# Allegro board wilkinson.brd
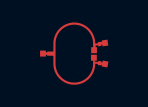
[diagram p0: board, top side]
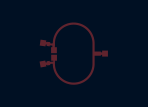
[diagram p1: board, bottom side, seen from below]

No outline. copper layers: TOP, BOTTOM. Coordinates in mm from the lowest, leftmost part position.

## Design rules (mm)
constraint set DEFAULT: min track width 0.127

## Placement (name value [footprint] x y rotation side)
U1  wilkinson  [WIL_SYM]  0 0 0 top

## Library data of the parts
U1 = wilkinson

## Footprints (pads in the part's own frame, mm; a bottom-side part is the same pattern mirrored in y, then rotated)
WIL_SYM
  rect 0.29x0.3 smd: 1(-0.575,0.002) 4(1.981,0.171) 5(1.975,-0.207)
  rect 0.29x0.3 smd rot 7.9: 2(2.528,0.531)
  rect 0.29x0.3 smd rot 169.6: 3(2.531,-0.519)

## Nets
INPUT: U1.1 U1.2 U1.3 U1.4 U1.5(R_2)

## Routing (per net, layer and track width the routed paths; a pad name or vN(x,y) marks a point on that pad's centre or on a via; arc(x,y) is an arc through that point)
INPUT: length 1.4
  TOP w0.08: U1.5 1.98,-0.41
  TOP w0.127: 2,0.47 2,0.19 U1.4 ; 2.3,-0.5 2.51,-0.5 U1.3 ; 2.26,0.51 2.51,0.51 U1.2 ; -0.2,0 U1.1

## Copper pours and planes (outline as drawn; the poured copper is in the pictures)
INPUT on TOP (solid shape): 1.07,1.55 1.13,1.55 1.18,1.54 1.23,1.53 1.29,1.51 1.34,1.5 1.39,1.48 1.44,1.46 1.48,1.43 1.53,1.41 1.58,1.38 1.62,1.35 1.66,1.31 1.7,1.28 1.74,1.24 1.78,1.2 1.81,1.16 1.85,1.12 1.88,1.07 1.9,1.02 1.93,0.98 1.95,0.93 1.97,0.88 1.99,0.83 2.01,0.78 2.02,0.72 2.03,0.67 2.03,0.62 2.04,0.56 2.04,0.51 2.11,0.51 2.17,0.52 2.16,0.57 2.32,0.59 2.35,0.39 2.2,0.36 2.19,0.41 2.04,0.4 1.93,0.4 1.93,0.51 1.93,0.56 1.93,0.6 1.92,0.65 1.9,0.75 1.89,0.79 1.87,0.84 1.85,0.88 1.83,0.93 1.81,0.97 1.78,1.01 1.76,1.05 1.73,1.09 1.7,1.13 1.67,1.16 1.63,1.2 1.59,1.23 1.56,1.26 1.52,1.29 1.48,1.31 1.43,1.34 1.39,1.36 1.35,1.38 1.3,1.39 1.26,1.41 1.21,1.42 1.16,1.43 1.11,1.44 1.07,1.44 1.02,1.45 0.97,1.45 0.92,1.44 0.87,1.44 0.82,1.43 0.78,1.42 0.73,1.41 0.68,1.39 0.64,1.38 0.59,1.36 0.55,1.34 0.51,1.31 0.47,1.29 0.43,1.26 0.39,1.23 0.36,1.2 0.32,1.16 0.29,1.13 0.26,1.09 0.23,1.05 0.2,1.01 0.18,0.97 0.15,0.93 0.13,0.88 0.11,0.84 0.1,0.79 0.09,0.75 0.07,0.7 0.07,0.65 0.06,0.6 0.06,0.56 0.05,0.51 0.05,-0.51 0.06,-0.56 0.06,-0.6 0.07,-0.65 0.07,-0.7 0.09,-0.75 0.1,-0.79 0.11,-0.84 0.13,-0.88 0.15,-0.93 0.18,-0.97 0.2,-1.01 0.23,-1.05 0.26,-1.09 0.29,-1.13 0.32,-1.16 0.36,-1.2 0.39,-1.23 0.43,-1.26 0.47,-1.29 0.51,-1.31 0.55,-1.34 0.59,-1.36 0.64,-1.38 0.68,-1.39 0.73,-1.41 0.78,-1.42 0.82,-1.43 0.87,-1.44 0.92,-1.44 0.97,-1.45 1.02,-1.45 1.07,-1.44 1.11,-1.44 1.16,-1.43 1.21,-1.42 1.26,-1.41 1.3,-1.39 1.35,-1.38 1.39,-1.36 1.43,-1.34 1.48,-1.31 1.52,-1.29 1.56,-1.26 1.59,-1.23 1.63,-1.2 1.67,-1.16 1.7,-1.13 1.73,-1.09 1.76,-1.05 1.78,-1.01 1.81,-0.97 1.83,-0.93 1.85,-0.88 1.87,-0.84 1.89,-0.79 1.9,-0.75 1.92,-0.65 1.93,-0.6 1.93,-0.56 1.93,-0.51 1.93,-0.4 2.04,-0.4 2.19,-0.41 2.2,-0.36 2.35,-0.39 2.32,-0.59 2.16,-0.57 2.17,-0.52 2.11,-0.51 2.04,-0.51 2.04,-0.56 2.03,-0.62 2.03,-0.67 2.02,-0.72 2.01,-0.78 1.99,-0.83 1.97,-0.88 1.95,-0.93 1.93,-0.98 1.9,-1.02 1.88,-1.07 1.85,-1.12 1.81,-1.16 1.78,-1.2 1.74,-1.24 1.7,-1.28 1.66,-1.31 1.62,-1.35 1.58,-1.38 1.53,-1.41 1.48,-1.43 1.44,-1.46 1.39,-1.48 1.34,-1.5 1.29,-1.51 1.23,-1.53 1.18,-1.54 1.13,-1.55 1.07,-1.55 1.02,-1.55 0.97,-1.55 0.91,-1.55 0.86,-1.55 0.81,-1.54 0.75,-1.53 0.7,-1.51 0.65,-1.5 0.6,-1.48 0.55,-1.46 0.5,-1.43 0.45,-1.41 0.41,-1.38 0.36,-1.35 0.32,-1.31 0.28,-1.28 0.24,-1.24 0.21,-1.2 0.17,-1.16 0.14,-1.12 0.11,-1.07 0.08,-1.02 0.06,-0.98 0.03,-0.93 0.01,-0.88 0,-0.83 -0.02,-0.78 -0.03,-0.72 -0.04,-0.67 -0.05,-0.62 -0.05,-0.56 -0.05,-0.51 -0.05,-0.1 -0.37,-0.1 -0.37,0.1 -0.05,0.1 -0.05,0.51 -0.05,0.56 -0.05,0.62 -0.04,0.67 -0.03,0.72 -0.02,0.78 0,0.83 0.01,0.88 0.03,0.93 0.06,0.98 0.08,1.02 0.11,1.07 0.14,1.12 0.17,1.16 0.21,1.2 0.24,1.24 0.28,1.28 0.32,1.31 0.36,1.35 0.41,1.38 0.45,1.41 0.5,1.43 0.55,1.46 0.6,1.48 0.65,1.5 0.7,1.51 0.75,1.53 0.81,1.54 0.86,1.55 0.91,1.55 0.97,1.55 1.02,1.55
